# EAGLE board controller brd (EAGLE 7.5.0)
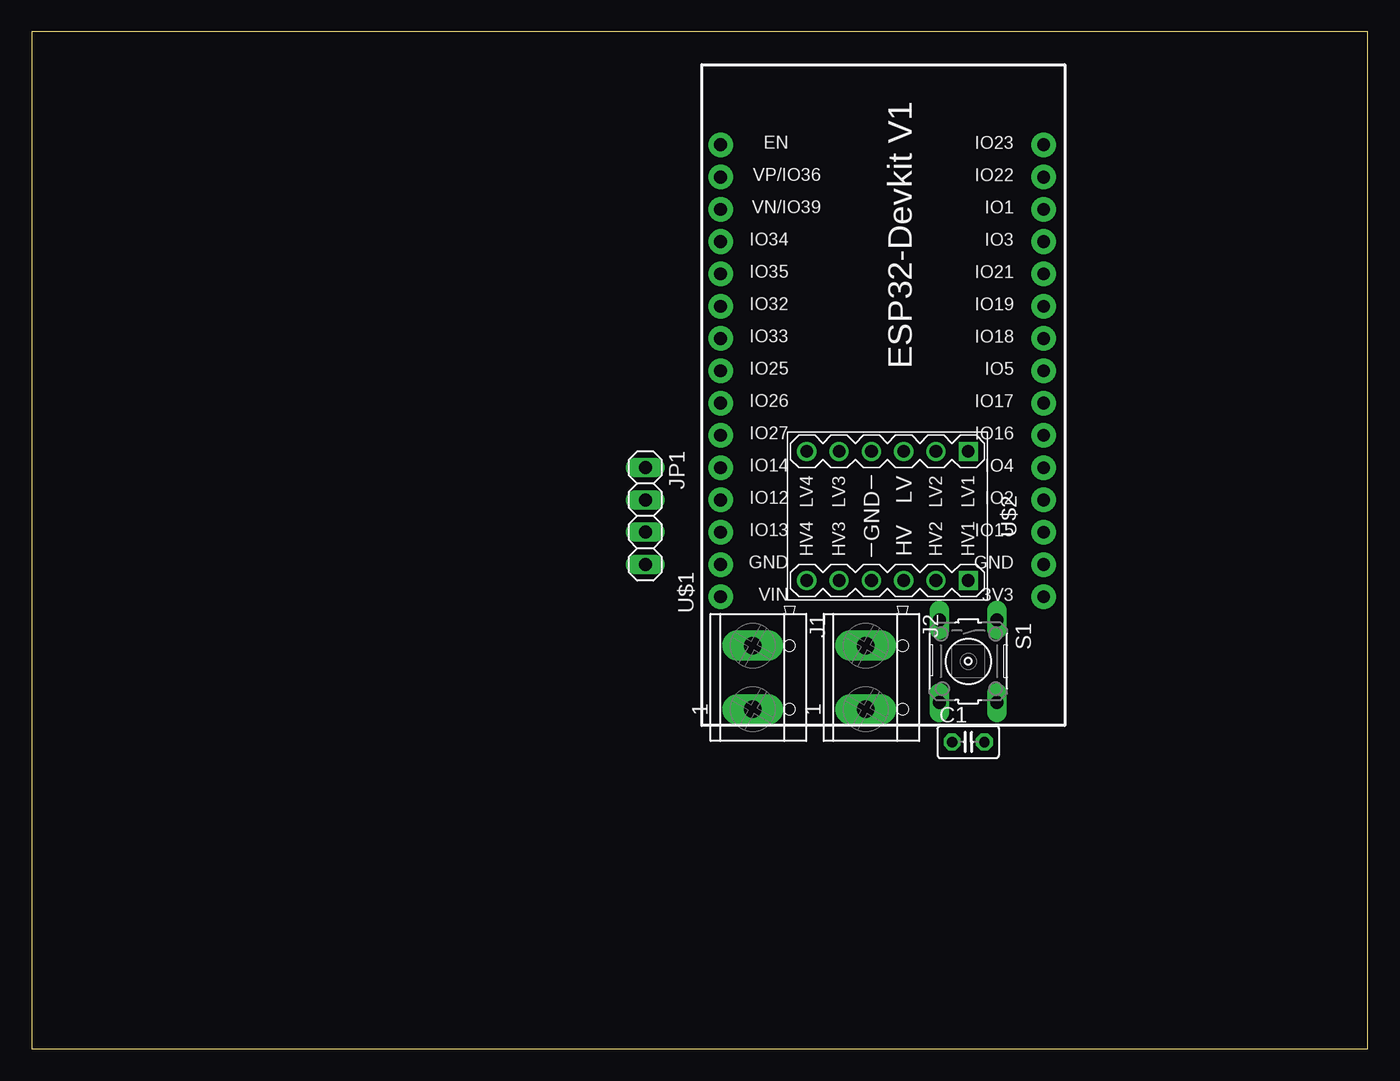
[diagram p0: board, top side]
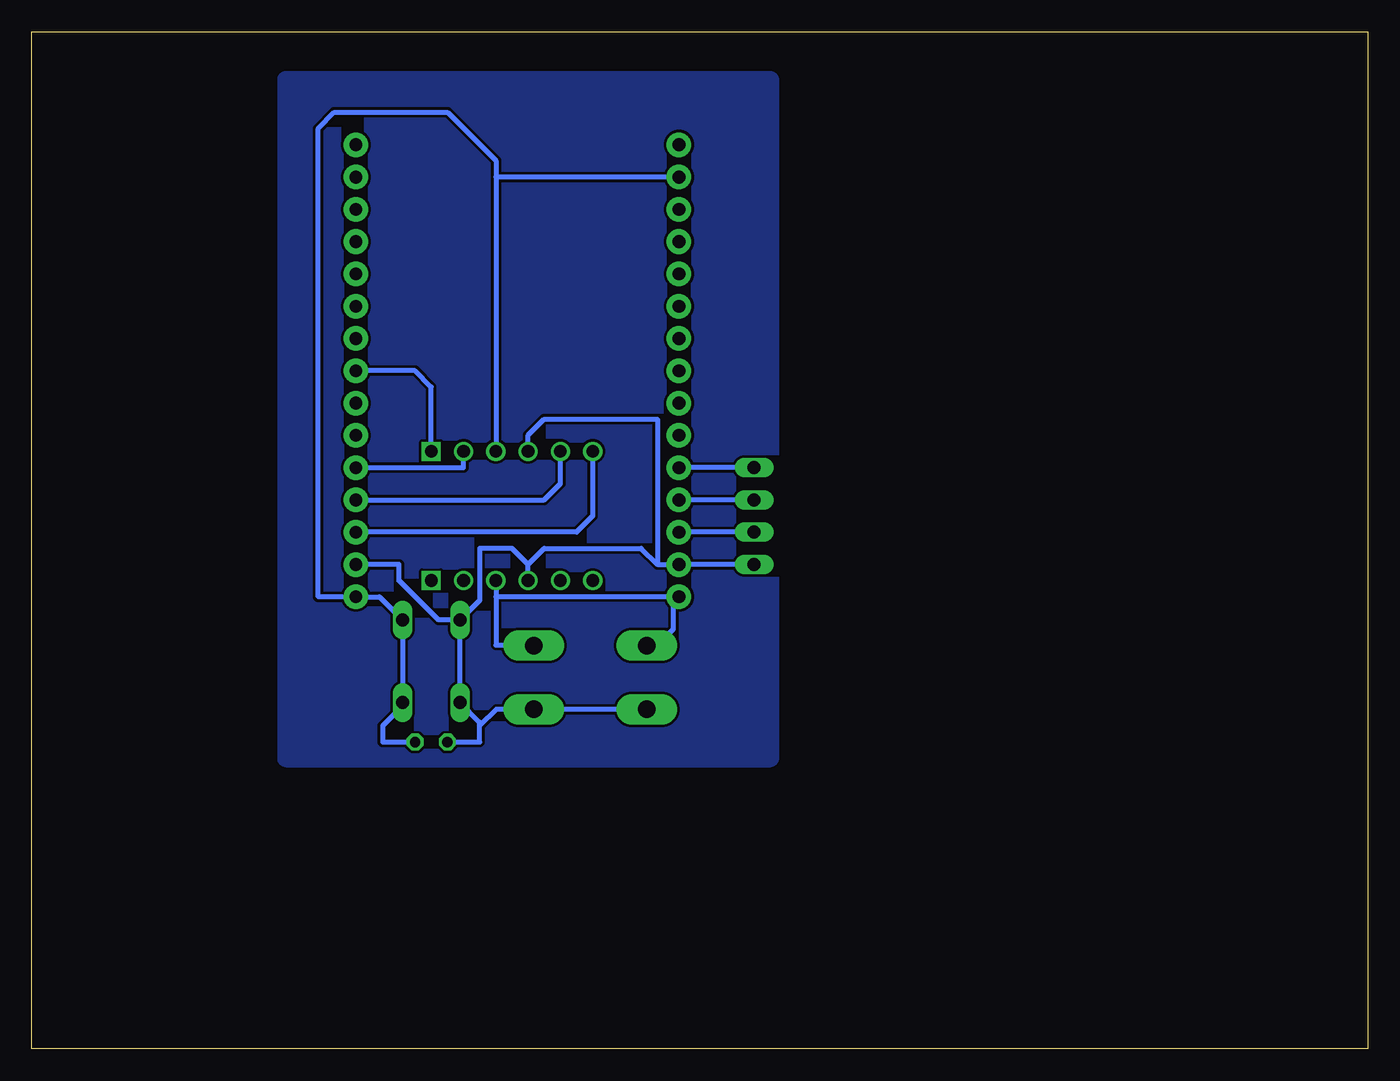
[diagram p1: board, bottom side, seen from below]

Size 105.08 x 80 mm. Coordinates in mm from the lower left corner, seen from the top.
Outline: 0,0 105.08,0 105.08,80 0,80 0,0
Copper layers (1*16): Top 0.035mm / dielectric 1.5mm / Bottom 0.035mm
Design rules "default": minimum track width 10mil, minimum drill 24mil, track to track 8mil, track to pad 8mil, pad to pad 8mil, via to via 8mil, smd to smd 8mil, copper to edge 40mil, drill to drill 8mil, minimum pad ring 10mil, minimum via ring 8mil, stop-mask expansion 4mil, vias tented up to drill 0mil, thermal gap 10mil

## Footprints (pad centres in the part's own frame; a part is rotated, then mirrored left to right if it is on the bottom)
C025-025X050 = drill 0.813 octagon: 1 -1.27,0; 2 1.27,0
TERMINAL_BLOCK_2P_5 = drill 1.4 pad 2.38 long: 1 2.5,-0.45; 2 -2.5,-0.45
1X04 = drill 1.016 long: 1 -3.81,0; 2 -1.27,0; 3 1.27,0; 4 3.81,0
B3F-10XX = drill 1.016 long: 1 -3.251,2.261; 2 3.251,2.261; 3 -3.251,-2.261; 4 3.251,-2.261
ESP32-DEVKITV1 = drill 1 pad 1.93: 3V3 -16.52,-12.27; D1 13.96,-12.27; D2 -8.9,-12.27; D3 11.42,-12.27; D4 -6.36,-12.27; D5 1.26,-12.27; D12 -8.9,13.135; D13 -11.44,13.135; D14 -6.36,13.135; D15 -11.44,-12.27; D16 -3.82,-12.27; D17 -1.28,-12.27; D18 3.8,-12.27; D19 6.34,-12.27; D21 8.88,-12.27; D22 16.5,-12.27; D23 19.04,-12.27; D25 1.26,13.135; D26 -1.28,13.135; D27 -3.82,13.135; D32 6.34,13.135; D33 3.8,13.135; D34 11.42,13.135; D35 8.88,13.135; D36 16.5,13.135; D39 13.96,13.135; EN 19.04,13.135; GND@1 -13.98,13.135; GND@2 -13.98,-12.27; VIN -16.52,13.135
LEVEL-SHIFTER-4CH = drill 1 square: J1.1 -5.08,6.35; J2.1 5.08,6.35 | drill 1: J1.2 -5.08,3.81; J1.3 -5.08,1.27; J1.4 -5.08,-1.27; J1.5 -5.08,-3.81; J1.6 -5.08,-6.35; J2.2 5.08,3.81; J2.3 5.08,1.27; J2.4 5.08,-1.27; J2.5 5.08,-3.81; J2.6 5.08,-6.35

## Placement (x,y rotation side)
C1  [C025-025X050]  73.66,24.13 0 top
J1  CON_TERMINAL_BLOCK_02-5MM  [TERMINAL_BLOCK_2P_5]  57.15,29.21 270 top
J2  CON_TERMINAL_BLOCK_02-5MM  [TERMINAL_BLOCK_2P_5]  66.04,29.21 270 top
JP1  [1X04]  48.26,41.91 270 top
S1  [B3F-10XX]  73.66,30.48 270 top
U$1  ESP32DEVKITV1  [ESP32-DEVKITV1]  67.31,52.07 90 top
U$2  LEVEL-SHIFTER-4CH  [LEVEL-SHIFTER-4CH]  67.31,41.91 270 top

## Library data of the parts
C1 = rcl; SPICEPREFIX: C
J1 J2 = tblok
JP1 = pinhead
S1 = switch-omron; MPN: B3F-1000; OC_FARNELL: 176432; OC_NEWARK: 36M3542
U$1 = esp32-devkitv1
U$2 = diy-model

## Nets
GND: C1.1 J1.1 J2.1 JP1.4 S1.3 S1.4 U$1.GND@1 U$1.GND@2 U$2.J1.4 U$2.J2.4
HV: J1.2 J2.2 U$1.VIN U$2.J2.3
LV: C1.2 S1.1 S1.2 U$1.3V3 U$1.D36 U$2.J1.3
LV1: U$1.D5 U$2.J1.1
LV2: U$1.D4 U$2.J1.2
LV3: U$1.D2 U$2.J1.5
LV4: U$1.D15 U$2.J1.6
OUT1: JP1.1 U$1.D14
OUT2: JP1.2 U$1.D12
OUT3: JP1.3 U$1.D13

## Tracks (layer width: path | path; a pad name or v marks a point on that pad's centre or on a via)
GND
  Bottom 0.406: JP1.4 U$1.GND@1 54.18,38.1 55.88,38.1 | C1.1 69.85,24.13 69.85,25.4 | 69.85,25.4 69.85,25.68 S1.4 S1.3 | S1.3 73.1,33.73 76.2,36.83 76.2,38.1 U$1.GND@2 | J1.1 J2.1 68.54,26.71 69.85,25.4 | U$2.J1.4 66.04,48.26 64.77,49.53 55.88,49.53 55.88,38.1 | 66.04,38.1 64.77,39.37 57.15,39.37 55.88,38.1 | U$2.J2.4 66.04,38.1 | 66.04,38.1 67.31,39.37 69.85,39.37 69.85,35.28 S1.3
HV
  Bottom 0.406: U$2.J2.3 68.58,35.56 | 68.58,35.56 54.18,35.56 U$1.VIN 54.61,35.12 54.61,33.02 55.92,31.71 J1.2 | 68.58,35.56 68.58,31.75 65.63,31.75 J2.2
LV
  Bottom 0.406: U$1.D36 68.57,68.57 68.58,68.58 | 68.58,68.58 U$2.J1.3 | C1.2 77.47,24.13 77.47,25.4 75.92,26.95 S1.2 S1.1 77.74,35.55 U$1.3V3 82.54,35.55 82.55,35.56 82.55,72.39 81.28,73.66 72.39,73.66 68.58,69.85 68.58,68.58
LV1
  Bottom 0.406: U$2.J1.1 73.66,52.07 74.93,53.34 U$1.D5
LV2
  Bottom 0.406: U$1.D4 71.13,45.71 71.12,45.72 U$2.J1.2
LV3
  Bottom 0.406: U$1.D2 64.78,43.17 63.5,44.45 U$2.J1.5
LV4
  Bottom 0.406: U$2.J1.6 60.96,41.91 62.23,40.64 U$1.D15
N$1
  pour Bottom: 48.26,76.2 85.09,76.2 85.09,22.86 46.99,22.86 46.99,76.2
OUT1
  Bottom 0.406: JP1.1 54.18,45.72 | 54.61,45.72 54.18,45.72 | 54.18,45.72 U$1.D14
OUT2
  Bottom 0.406: JP1.2 U$1.D12
OUT3
  Bottom 0.406: JP1.3 U$1.D13